# Altium PCB HVSUP_ISOL.PCBDOC (part 2 of 2)
Units mm, origin at the board's own origin, x right, y up, seen from the top; angles counter-clockwise.
Board outline 222.63 x 100.1 mm, 4 copper layers (Top, GP1(GND), L3, Bot), stack 1.648 mm thick; 144 components, 102 nets, 508 pads, 186 vias.
Unrouted connection lines stored in the file: 240.
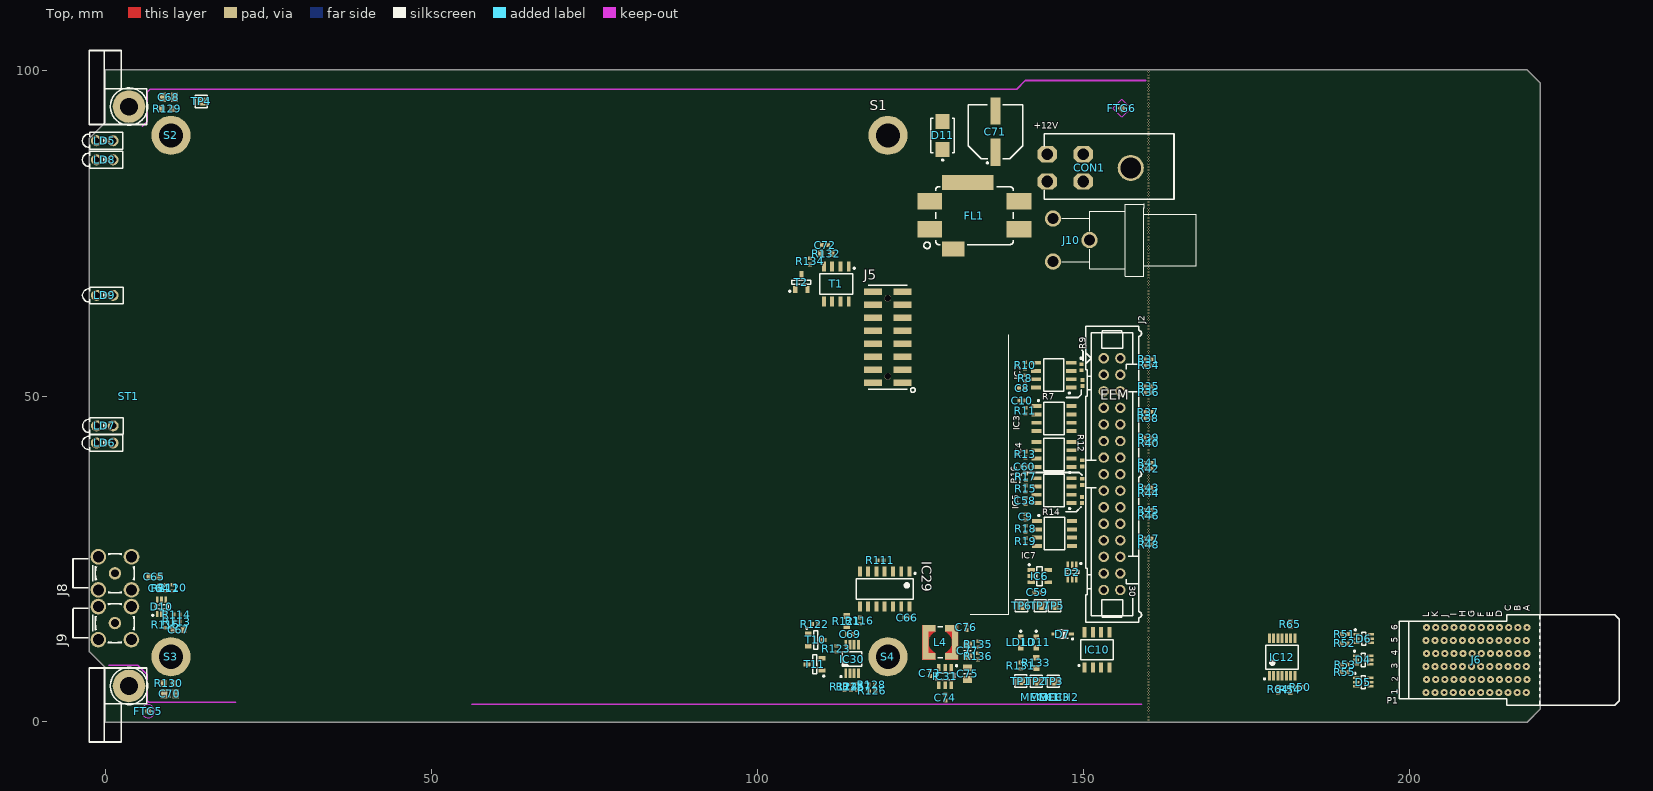
[diagram p0: Top view]

## Part data (continued)
R117 R118 R119 R120 R121: library part R0603_220R_1%_0.1W_100PPM, "Resistor - 1%", Case=0603, Manufacturer=GENERIC, Manufacturer1 ComponentHeight=0.55mm, Manufacturer1 Example="NIC COMPONENT", Manufacturer1 Part Number=NRC06F2200TRF, Power=0.1W, Tolerance=±1%, Author="CERN DEM JLC", Component Type=Standard, CreateDate=03.12.2007, HelpURL=\\cern.ch\dfs\Applications\Altium\Datasheets\R0603_NIC_NRC.pdf, LatestRevisionDate=13.03.2008, Manufacturer Part Number=R0603_220R_1%_0.1W_100PPM, Mounted=Yes, Part Description="General Purpose Thick Film Chip Resistor", Part Number=R0603_220R_1%_0.1W_100PPM, Pin Count=2, Sense=No, SMD=Yes, Socket=No, Status=Preferred, TC=±100ppm/°C
R129 R130: library part R0603_0R_JUMPER, "Resistor", Case=0603, Manufacturer=GENERIC, Manufacturer1 ComponentHeight=0.55mm, Manufacturer1 Example="NIC COMPONENT", Manufacturer1 Part Number=NRC06Z0, Author="CERN DEM JLC", Component Type=Standard, CreateDate=03.12.2007, HelpURL=\\cern.ch\dfs\Applications\Altium\Datasheets\R0603_NIC_NRC.pdf, LatestRevisionDate=13.03.2008, Manufacturer Part Number=R0603_0R_JUMPER, Mounted=Yes, Part Description="1A (0.05R Max DC Resistance) Zero Ohm Jumper", Part Number=R0603_0R_JUMPER, Pin Count=2, PressFit=No, Sense=No, SMD=Yes, Socket=No, Status=Preferred
R132: library part R0603_100K_1%_0.1W_100PPM, "Resistor - 1%", Case=0603, Manufacturer=GENERIC, Manufacturer1 ComponentHeight=0.55mm, Manufacturer1 Example="NIC COMPONENT", Manufacturer1 Part Number=NRC06F1003TRF, Power=0.1W, Tolerance=±1%, Author="CERN DEM JLC", Component Type=Standard, CreateDate=2007-12-03, HelpURL=\\cern.ch\dfs\Applications\Altium\Datasheets\R0603_NIC_NRC.pdf, LatestRevisionDate=2008-03-13, Manufacturer Part Number=R0603_100K_1%_0.1W_100PPM, Mounted=Yes, Part Description="General Purpose Thick Film Chip Resistor", Part Number=R0603_100K_1%_0.1W_100PPM, Pin Count=2, Sense=No, SMD=Yes, Socket=No, Status=Preferred, TC=±100ppm/°C
R133: library part R0603_1K_1%_0.1W_100PPM, "Resistor - 1%", Case=0603, Manufacturer=GENERIC, Manufacturer1 ComponentHeight=0.55mm, Manufacturer1 Example="NIC COMPONENT", Manufacturer1 Part Number=NRC06F1001TRF, Power=0.1W, Tolerance=±1%, Author="CERN DEM JLC", Component Type=Standard, CreateDate=03.12.2007, HelpURL=\\cern.ch\dfs\Applications\Altium\Datasheets\R0603_NIC_NRC.pdf, LatestRevisionDate=13.03.2008, Manufacturer Part Number=R0603_1K_1%_0.1W_100PPM, Mounted=Yes, Part Description="General Purpose Thick Film Chip Resistor", Part Number=R0603_1K_1%_0.1W_100PPM, Pin Count=2, PressFit=No, Sense=No, SMD=Yes, Socket=No, Status=Preferred, TC=±100ppm/°C
R135: library part R0402_31K6_0.1%_0.063W_25PPM_YAGEO_RT, "Resistor - 0.1%", Case=0402, Manufacturer=YAGEO, Manufacturer Part Number=RT0402BRD0731K6L, Power=0.063W, Tolerance=±0.1%, Voltage=50V, Author="CERN DEM BC", Component Type=Standard, ComponentHeight=0.35mm, CreateDate=30.07.2020, HelpURL=\\cern.ch\dfs\Applications\Altium\Datasheets\R0402_YAGEO_RT.pdf, LatestRevisionDate=30.07.2020, Mounted=Yes, Part Description="Thin Film Chip Resistor", Part Number=R0402_31K6_0.1%_0.063W_25PPM_YAGEO_RT, Pin Count=2, PressFit=No, Sense=No, SMD=Yes, Socket=No, Status="Not Recommended", TC=±25ppm/°C
S1 S2 S3 S4: library part "WA-SMSI,  9774030151", "WA-SMSI SMD Steel Spacer with internal Thread", Manufacturer="Wurth Elektronik", ComponentLink1Description=Manufacturer, ComponentLink1URL=http://www.we-online.de, ComponentLink2Description=Datasheet, ComponentLink2URL=http://katalog.we-online.de/em/datasheet/9774030151.pdf, Created by="Baojun Chen", Created Date=20.Oct.2015, partNo=9774030151
ST1: "Schroff 3HP 4U EUROCARD Panel Kit", Manufacturer=Schroff, Manufacturer Part Number=20818-017, Manufacturer Part Number 2=20848-664
T1: "-30V -19.7A P-Channel MOSFET", Case=SOIC8, Manufacturer="VISHAY SILICONIX", Author="CERN DEM MR", Bonding=No, Component Type=Standard, ComponentHeight=1.75mm, CreateDate=05/10/2016, Device=SI4425DDY-T1-GE3, HelpURL=\\cern.ch\dfs\Applications\Altium\Datasheets\SI4425DDY-T1-GE3.pdf, LatestRevisionDate=05/10/2016, Manufacturer Part Number=SI4425DDY-T1-GE3, Mounted=Yes, PackageDescription="SOIC 8, Pitch 1.27mm - Body 4x5mm, IPC Medium Density", Part Description="-30V -19.7A P-Channel MOSFET", Part Number=SI4425DDY-T1-GE3, Pin Count=8, PressFit=No, Sense=No, SMD=Yes, Socket=No
T2 T3 T4 T9 T10 T11: "N-CHANNEL MOSFET WITH DIODE", Case=SOT23-3, Manufacturer="ON SEMICONDUCTOR", Author="CERN DEM JLC", Bonding=No, Component Type=Standard, ComponentHeight=1.11mm, CreateDate=23.03.2009, Device=BSS138LT1G, HelpURL=\\cern.ch\dfs\Applications\Altium\Datasheets\BSS138LT1G.pdf, LatestRevisionDate=23.03.2009, Manufacturer Part Number=BSS138LT1G, Mounted=Yes, PackageDescription="SOT23 3-Leads, Pitch 0.95mm - Body 1.4x3mm, IPC Medium Density", Part Description="50V 200mA N-Channel Enhancement Mode Field-Effect Transistor", Part Number=BSS138LT1G, Pin Count=3, PressFit=No, Sense=No, SMD=Yes, Socket=No
TP1 TP2 TP3 TP4 TP5 TP6 TP7: library part SMD_PAD_1.27X1.27MM, Author="CERN DEM JLC", Component Type="Standard (No BOM)", ComponentHeight=0mm, CreateDate=12.01.2008, Family="Test Point", HelpURL=Undefined, LatestRevisionDate=12.01.2008, Mounted=No, PackageDescription="1.27mm x 1.27mm PCB Copper Area (SMD Test Point)", Part Description="1.27mm x 1.27mm PCB Copper Area (SMD Test Point)", Part Number=SMD_PAD_1.27X1.27MM, Pin Count=1, Sense=No, SMD=Yes, Socket=No, Status=None

## Via types
v1: diameter 0.3, hole 0.15, Top to Bot, tented both sides, 186 vias

## Nets (pads, with @x,y where several pads share a name; then routed paths per layer and width w, separated by ;. In a path a pad name is that pad's centre, name@x,y a point inside that pad or via, vN(x,y) a via of type N, cw(c..) or ccw(c..) an arc to the next point about the centre after c; other vN are vias at no path point)
BP_IO.GA0: R51.1
BP_IO.GA1: R52.1
BP_IO.GA2: R53.1
BP_IO.GA3: R55.1
BP_IO.LVDS_N0: J6.D3 R34.2
BP_IO.LVDS_N1: J6.B3 R36.2
BP_IO.LVDS_N2: J6.C4 R38.2
BP_IO.LVDS_N3: J6.L4 R40.2
BP_IO.LVDS_N4: J6.I4 R42.2
BP_IO.LVDS_N5: J6.K5 R44.2
BP_IO.LVDS_N6: J6.H5 R46.2
BP_IO.LVDS_N7: J6.F6 R48.2
BP_IO.LVDS_P0: J6.E3 R31.2
BP_IO.LVDS_P1: J6.A3 R35.2
BP_IO.LVDS_P2: J6.B4 R37.2
BP_IO.LVDS_P3: J6.K4 R39.2
BP_IO.LVDS_P4: J6.H4 R41.2
BP_IO.LVDS_P5: J6.J5 R43.2
BP_IO.LVDS_P6: J6.G5 R45.2
BP_IO.LVDS_P7: J6.E6 R47.2
BP_SCL: D5.1 IC12.8 IC12.11 J6.B2
BP_SDA: D5.3 IC12.1 IC12.4 J6.C2
CSN: J5.5 R13.1
DIO0: D10.3 J9.1 R113.1 R115.2
DIO1: D10.4 J8.1 R110.1 R112.2
GND: C8.1 C9.1 C10.1 C58.1 C59.1 C60.1 C64.1 C65.1 C66.1 C67.1 C68.2 C69.1 C70.2 C71.2 C74.1 C75.1 C76.1 C77.1 D2.2 D4.2 D5.2 D6.2 D10.2 D11.2 FL1.4 IC2.5 IC3.3 IC3.4 IC4.5 IC5.5 IC6.2 IC7.4 IC10.1 IC10.2 IC10.3 IC10.4 IC12.7 IC29.7 IC30.4 IC30.5 IC30.6 IC30.7 IC31.1 J2.1 J2.4 J2.7 J2.10 J2.13 J2.16 J2.19 J2.22 J2.25 J5.2 J5.4 J5.14 J5.16 J6.A2 J6.A4 J6.A6 J6.C1 J6.C5 J6.D2 J6.D4 J6.D6 J6.F1 J6.F5 J6.G2 J6.G4 J6.G6 J6.I1 J6.I5 J6.J2 J6.J4 J6.J6 J6.L1 J6.L5 J8.2 J9.2 LD10.1 LD11.1 R50.1 R118.2 R129.1 R130.1 R136.1 S1.1 S2.1 S3.1 S4.1 T2.2 T3.2 T4.2 T9.2 T10.2 T11.2 TP3.1 TP4.1
GNDF: CON1.1 CON1.2 FL1.3 J10.1
HV_EN: J5.15 R15.1 R111.2
HV_INTERLOCK: R19.1 R116.2 T9.1
I2C_SCL: D2.4 IC6.1 IC10.6 IC12.9 IC12.10 J2.27 R65.1 R128.1 TP6.1
I2C_SDA: D2.3 IC6.3 IC10.5 IC12.2 IC12.3 J2.26 R64.1 R126.1 TP5.1
INT0: J5.9 R18.1 T3.1
LVDS0_N: IC2.4 J2.3 R9.2 R34.1
LVDS0_P: IC2.3 J2.2 R9.1 R31.1
LVDS1_N: IC2.1 J2.6 R7.1 R36.1
LVDS1_P: IC2.2 J2.5 R7.2 R35.1
LVDS2_N: IC3.7 J2.9 R38.1
LVDS2_P: IC3.8 J2.8 R37.1
LVDS3_N: IC4.1 J2.12 R12.1 R40.1
LVDS3_P: IC4.2 J2.11 R12.2 R39.1
LVDS4_N: IC5.4 J2.15 R16.2 R42.1
LVDS4_P: IC5.3 J2.14 R16.1 R41.1
LVDS5_N: IC5.1 J2.18 R14.1 R44.1
LVDS5_P: IC5.2 J2.17 R14.2 R43.1
LVDS6_N: IC7.7 J2.21 R46.1
LVDS6_P: IC7.8 J2.20 R45.1
LVDS7_N: IC7.5 J2.24 R48.1
LVDS7_P: IC7.6 J2.23 R47.1
NetC65_2: C65.2 R112.1
NetC67_2: C67.2 R115.1
NetC68_1: C68.1 R129.2 ST1.1
NetC70_1: C70.1 R130.2 ST1.0
NetC72_1: C72.1 R132.1 R134.2 T1.4
NetC73_1: C73.1 IC31.6
NetC73_2: C73.2 IC31.2 L4.1
NetD4_3: D4.3 J6.I3 R53.2
NetD4_6: D4.6 J6.K2 R54.2
NetD5_6: D5.6 J6.L3 R55.2
NetD6_1: D6.1 J6.C3 R51.2
NetD6_3: D6.3 J6.F3 R52.2
NetIC2_6: IC2.6 R10.2
NetIC2_7: IC2.7 R8.2
NetIC3_2: IC3.2 R11.2
NetIC4_7: IC4.7 R13.2
NetIC5_6: IC5.6 R17.2
NetIC5_7: IC5.7 R15.2
NetIC7_2: IC7.2 R18.2
NetIC7_3: IC7.3 R19.2
NetIC29_5: IC29.5 R111.1
NetIC29_6: IC29.6 R110.2
NetIC29_8: IC29.8 R116.1
NetIC29_9: IC29.9 R113.2 R114.1
NetIC30_1: IC30.1 R124.1 R126.2
NetIC30_2: IC30.2 R125.1 R128.2
NetIC30_3: IC30.3 R127.1
NetIC31_4: IC31.4 R135.1 R136.2
NetLD5_1: LD5.1 R119.1
NetLD6_1: LD6.1 R120.1
NetLD7_2: LD7.2 R121.2
NetLD8_1: LD8.1 R117.1
NetLD9_1: LD9.1 R118.1
NetLD10_2: LD10.2 R131.1
NetLD11_2: LD11.2 R133.2
NetR117_2: R117.2 T3.3
NetR119_2: R119.2 T4.3
NetR120_2: R120.2 T9.3
NetR122_2: R122.2 T10.1 T11.3
NetR123_2: R123.2 R127.2 T11.1
NetR134_1: R134.1 T2.3
P3V3: C8.2 C9.2 C10.2 C58.2 C60.2 C64.2 C66.2 C76.2 C77.2 D7.2 D10.5 IC2.8 IC3.1 IC4.8 IC5.8 IC7.1 IC12.14 IC29.14 L4.2 LD5.2 LD6.2 LD8.2 LD9.2 R64.2 R65.2 R114.2 R133.1 R135.2
P3V3_MP: C59.2 C69.2 D2.5 D7.1 IC6.4 IC10.8 IC30.8 J2.30 R121.1 R122.1 R123.1 R124.2 R125.2 TP7.1
P3V3A: TP2.1
P12V0: C71.1 C72.2 C74.2 C75.2 D11.1 FL1.2 IC31.3 IC31.5 J2.28 J2.29 J6.A1 J6.D1 J6.E1 J6.G1 J6.H1 J6.J1 J6.K1 R131.2 R132.2 T1.1 T1.2 T1.3 TP1.1
P12V0_SW: J5.6 J5.8 J5.10 T1.5 T1.6 T1.7 T1.8
P12V0F: CON1.3 CON1.4 FL1.1 J10.3
PE_CLK.CLK_N: J6.F4
PE_CLK.CLK_P: J6.E4
PSU_EN: LD7.1 R17.1 T2.1 T4.1 T10.3
SCKI: J5.7 R10.1
SDI: J5.1 R8.1
SDO: J5.3 R11.1
SERVMOD: IC12.5 IC12.6 IC12.12 IC12.13 R50.2 R54.1
pads on no net: CON1.9 D2.1 D2.6 D4.1 D4.4 D4.5 D5.4 D5.5 D6.4 D6.5 D6.6 D10.1 D10.6 FTG5.FTG2 FTG6.1 FTG7.1 FTG8.1 IC3.5 IC3.6 IC4.3 IC4.4 IC4.6 IC6.5 IC10.7 IC29.1 IC29.2 IC29.3 IC29.4 IC29.10 IC29.11 IC29.12 IC29.13 J5. J5.11 J5.12 J5.13 J6.A5 J6.B1 J6.B5 J6.B6 J6.C6 J6.D5 J6.E2 J6.E5 J6.F2 J6.G3 J6.H2 J6.H3 J6.H6 J6.I2 J6.I6 J6.J3 J6.K3 J6.K6 J6.L2 J6.L6 J10.2 S1. S2. S3. S4.
copper on no net:
  other v1: 159.995,0.278 159.995,0.766 159.995,1.254 159.995,1.741 159.995,2.229 159.995,2.717 159.995,3.205 159.995,3.692 159.995,4.18 159.995,4.668 159.995,5.156 159.995,5.643 159.995,6.131 159.995,6.619 159.995,7.107 159.995,7.594 159.995,8.082 159.995,8.57 159.995,9.058 159.995,9.545 159.995,10.033 159.995,10.521 159.995,11.009 159.995,11.009 159.995,11.496 159.995,11.984 159.995,12.472 159.995,12.96 159.995,13.447 159.995,13.935 159.995,14.423 159.995,14.911 159.995,15.398 159.995,15.886 159.995,16.374 159.995,16.862 159.995,17.349 159.995,17.837 159.995,18.325 159.995,18.813 159.995,19.3 159.995,19.788 159.995,20.276 159.995,20.763 159.995,21.251 159.995,21.739 159.995,22.227 159.995,22.714 159.995,23.202 159.995,23.69 159.995,23.69 159.995,24.178 159.995,24.665 159.995,25.153 159.995,25.641 159.995,26.129 159.995,26.616 159.995,28.567 159.995,29.055 159.995,29.543 159.995,30.031 159.995,30.518 159.995,31.006 159.995,32.957 159.995,33.445 159.995,33.933 159.995,34.42 159.995,36.371 159.995,36.859 159.995,37.347 159.995,37.835 159.995,38.322 159.995,40.273 159.995,40.761 159.995,41.249 159.995,41.736 159.995,42.224 159.995,44.175 159.995,44.663 159.995,45.151 159.995,45.638 160,46 159.995,48.077 159.995,48.565 159.995,49.053 159.995,49.053 159.995,49.54 159.995,50.028 159.995,51.979 159.995,52.467 159.995,52.955 159.995,53.442 159.995,53.93 159.995,56.369 159.995,56.857 159.995,57.344 159.995,57.832 159.995,58.32 159.995,58.807 159.995,59.295 159.995,59.783 159.995,60.271 159.995,60.758 159.995,61.246 159.995,61.734 159.995,61.734 159.995,62.222 159.995,62.709 159.995,63.197 159.995,63.685 159.995,64.173 159.995,64.66 159.995,65.148 159.995,65.636 159.995,66.124 159.995,66.611 159.995,67.099 159.995,67.587 159.995,68.075 159.995,68.562 159.995,69.05 159.995,69.538 159.995,70.026 159.995,70.513 159.995,71.001 159.995,71.489 159.995,71.977 159.995,72.464 159.995,72.952 159.995,73.44 159.995,73.928 159.995,74.415 159.995,74.415 159.995,74.903 159.995,75.391 159.995,75.878 159.995,76.366 159.995,76.854 159.995,77.342 159.995,77.829 159.995,78.317 159.995,78.805 159.995,79.293 159.995,79.78 159.995,80.268 159.995,80.756 159.995,81.244 159.995,81.731 159.995,82.219 159.995,82.707 159.995,83.195 159.995,83.682 159.995,84.17 159.995,84.658 159.995,85.146 159.995,85.633 159.995,86.121 159.995,86.609 159.995,87.097 159.995,87.097 159.995,87.584 159.995,88.072 159.995,88.56 159.995,89.048 159.995,89.535 159.995,90.023 159.995,90.511 159.995,90.999 159.995,91.486 159.995,91.974 159.995,92.462 159.995,92.95 159.995,93.437 159.995,93.925 159.995,94.413 159.995,94.9 159.995,95.388 159.995,95.876 159.995,96.364 159.995,96.851 159.995,97.339 159.995,97.827 159.995,98.315 159.995,98.802 159.995,99.29 159.995,99.778

## Polygon pours and split planes (outlines as drawn)
GND on GP1(GND) (split plane): 159.995,99.54 159.995,99.502 160.038,99.52 160.036,99.54 217.848,99.54 219.579,97.81 219.579,2.19 217.848,0.46 0.46,0.46 0.46,8.299 0.45,8.398 0.421,8.494 0.374,8.582 0.311,8.66 -2.029,11 -2.029,15.106 -2.005,15.104 -1.991,15.138 -2.029,15.138 -2.029,15.14 -2.029,15.142 -2.029,15.144 -2.029,15.145 -2.029,15.146 -1.991,15.146 -2.005,15.18 -2.029,15.178 -2.029,22.645 -2.029,89.32 0.311,91.66 0.374,91.737 0.421,91.826 0.45,91.921 0.46,92.021 0.46,99.54 159.99,99.54 159.993,99.54

## Keep-outs
Top:
  lines w0.254: 0.453,8.689 4.9,8.689 6.35,7.239 6.35,6.475 ; 5.639,91.389 6.325,92.075 6.325,93.523 ; 6.325,95.174 6.325,96.597 6.782,97.053 139.743,97.053 141.089,98.4 159.577,98.4 ; 6.35,4.7 6.35,3.251 6.601,3 19.888,3 ; 56.137,2.721 158.944,2.721
Bot:
  lines w0.254: 0.025,91.389 5.639,91.389 6.325,92.075 6.325,96.597 7.036,97.307 159.461,97.307 ; 0.356,8.712 4.801,8.712 6.35,7.163 6.35,6.475 ; 6.35,7.214 6.35,6.475 ; 21.097,3.048 6.553,3.048 6.35,3.251 6.35,4.7 6.35,4.775 6.629,5.055 6.629,6.196 6.35,6.475 ; 68.788,2.713 148.865,2.713 159.563,2.713

## Other copper
GP1(GND) (plane layer: these items are gaps in the copper):
  rectangle: 82.174,12.776 91.389,16.114

## Silkscreen, mask and mechanical layers (free items; w line width, h text height)
TopOverlay:
  circle w0.254: c3.556,5.512 r2.857
  circle w0.254: c3.556,94.412 r2.857
  lines w0.1: 132.664,16.51 138.5,16.51 138.571,16.581 138.571,59.436
  lines w0.254: 140.208,36.678 140.208,37.713 140.77,38.275 149.357,38.275 149.794,37.838 ; 147.269,32.233 148.898,32.233 149.631,32.966 ; 147.38,49.784 149.2,49.784 149.685,50.269 149.685,50.978 ; 149.767,57.008 149.794,57.008 149.936,56.865 149.936,55.425
  text "+12V" at 142.4,91 h1.02
  text "EEM" at 152.603,49.403 h1.52
BottomOverlay:
  lines w0.254: 141.402,50.013 144.508,50.013 144.678,49.842 ; 142.843,32.18 144.714,32.18 144.865,32.029
Mechanical1:
  lines w0.1: -2.489,10.809 0,8.32 0,0 159.995,0 ; -2.489,10.82 -2.489,15.138 ; -2.489,15.145 -2.489,22.645 ; -2.489,22.645 -2.489,89.511 -1,91 0,92 0,100 159.995,100 ; -2.489,22.645 -2.489,22.645 ; 159.995,0 218.039,0 220.039,2 220.039,98 218.039,100 159.995,100 ; 159.995,0 159.995,100
Mechanical4:
  lines w0.1: -2.6,-14.238 -2.6,117.232
  lines w0.15: -5.044,-14.194 -5.044,114.162
  lines w0.3: 0.482,44 1.75,44 ; 0.482,61 1.75,61 ; 0.914,79.4 1.014,79.5 2.5,79.5 ; 1.232,28.95 2.5,28.95 ; 1.232,35.5 2.5,35.5 ; 1.232,52.5 2.5,52.5 ; 1.232,69.5 2.5,69.5 ; 1.232,76.5 2.5,76.5 3.759,76.5 ; 1.232,86.5 2.5,86.5 ; 1.739,45.562 1.75,45.551 1.75,44 ; 1.739,62.562 1.75,62.551 1.75,61 ; 1.75,42.652 1.75,44 ; 1.75,59.652 1.75,61 ; 2.288,5.512 3.556,5.512 ; 2.464,74.854 2.5,74.89 2.5,79.5 ; 2.489,30.512 2.5,30.501 2.5,28.95 ; 2.489,37.062 2.5,37.051 2.5,35.5 ; 2.489,54.062 2.5,54.051 2.5,52.5 ; 2.489,71.062 2.5,71.051 2.5,69.5 ; 2.489,88.062 2.5,88.051 2.5,86.5 ; 2.5,27.602 2.5,28.95 ; 2.5,34.152 2.5,35.5 ; 2.5,51.152 2.5,52.5 ; 2.5,68.152 2.5,69.5 ; 2.5,81.712 2.5,79.5 ; 2.5,85.152 2.5,86.5 ; 3.545,7.074 3.556,7.063 3.556,5.512 ; 3.556,4.163 3.556,5.512 ; 3.606,44 1.75,44 ; 3.606,61 1.75,61 ; 3.759,79.5 2.5,79.5 ; 4.356,28.95 2.5,28.95 ; 4.356,35.5 2.5,35.5 ; 4.356,52.5 2.5,52.5 ; 4.356,69.5 2.5,69.5 ; 4.356,86.5 2.5,86.5 ; 5.412,5.512 3.556,5.512
DrillDrawing:
  drawing of 295 lines, arcs and shapes, not listed
  text "Layer" at 8.894,137.706 h1.52
  text "Name" at 19.305,137.706 h1.52
  text "Material" at 41.397,137.706 h1.52
  text "Thickness" at 63.235,137.706 h1.52
  text "Constant" at 79.741,137.706 h1.52
  text "Board Layer Stack" at 94.216,137.706 h1.52
  text "TopOverlay" at 19.305,134.658 h1.52
  text "TopSolder" at 19.305,131.61 h1.52
  text "Solder Resist" at 41.397,131.61 h1.52
  text "0,010mm" at 63.235,131.61 h1.52
  text "3.5" at 79.741,131.61 h1.52
  text "1" at 8.894,128.562 h1.52
  text "Top" at 19.305,128.562 h1.52
  text "0,058mm" at 63.235,128.562 h1.52
  text "Dielectric1" at 19.305,125.514 h1.52
  text "FR-4" at 41.397,125.514 h1.52
  text "0,180mm" at 63.235,125.514 h1.52
  text "4.2" at 79.741,125.514 h1.52
  text "2" at 8.894,122.466 h1.52
  text "GP1(GND)" at 19.305,122.466 h1.52
  text "0,036mm" at 63.235,122.466 h1.52
  text "Dielectric 3" at 19.305,119.418 h1.52
  text "FR-4" at 41.397,119.418 h1.52
  text "1,100mm" at 63.235,119.418 h1.52
  text "4.2" at 79.741,119.418 h1.52
  text "3" at 8.894,116.37 h1.52
  text "L3" at 19.305,116.37 h1.52
  text "0,036mm" at 63.235,116.37 h1.52
  text "Dielectric2" at 19.305,113.322 h1.52
  text "FR-4" at 41.397,113.322 h1.52
  text "0,180mm" at 63.235,113.322 h1.52
  text "4.2" at 79.741,113.322 h1.52
  text "4" at 8.894,110.274 h1.52
  text "Bot" at 19.305,110.274 h1.52
  text "0,058mm" at 63.235,110.274 h1.52
  text "BottomSolder" at 19.305,107.226 h1.52
  text "Solder Resist" at 41.397,107.226 h1.52
  text "0,010mm" at 63.235,107.226 h1.52
  text "3.5" at 79.741,107.226 h1.52
  text "BottomOverlay" at 19.305,104.178 h1.52

## Text inside footprints (layer, text, board x,y; h text height)
J2: TopOverlay "30" at 157.051,20.873 h1.02 r270; Mechanical14 "30" at 157.051,20.873 h1.02 r270
J6: TopOverlay "A" at 218.464,16.95 h1 r90; TopOverlay "B" at 217.064,16.95 h1 r90; TopOverlay "C" at 215.664,16.95 h1 r90; TopOverlay "D" at 214.264,16.025 h1 r90; TopOverlay "E" at 212.864,16.025 h1 r90; TopOverlay "6" at 198.225,14.075 h1 r90; TopOverlay "5" at 198.225,12.125 h1 r90; TopOverlay "4" at 198.2,10.175 h1 r90; TopOverlay "3" at 198.25,8.175 h1 r90; TopOverlay "F" at 211.464,16.025 h1 r90; TopOverlay "G" at 210.064,16.025 h1 r90; TopOverlay "H" at 208.664,16.025 h1 r90; TopOverlay "I" at 207.264,16.275 h1 r90; TopOverlay "J" at 205.864,16.025 h1 r90; TopOverlay "K" at 204.464,16.025 h1 r90; TopOverlay "2" at 198.239,6.15 h0.95 r90; TopOverlay "L" at 203.064,16.025 h1 r90; TopOverlay "1" at 198.239,4.15 h1 r90; Mechanical14 "A" at 218.439,1.3 h1 r90; Mechanical14 "B" at 217.039,1.3 h1 r90; Mechanical14 "C" at 215.639,1.3 h1 r90; Mechanical14 "D" at 214.239,2.3 h1 r90; Mechanical14 "E" at 212.839,2.3 h1 r90; Mechanical14 "6" at 197.989,14.15 h1 r90; Mechanical14 "5" at 197.989,12.15 h1 r90; Mechanical14 "4" at 197.989,10.15 h1 r90; Mechanical14 "3" at 197.989,8.15 h1 r90; Mechanical14 "F" at 211.439,2.3 h1 r90; Mechanical14 "G" at 210.039,2.3 h1 r90; Mechanical14 "H" at 208.639,2.3 h1 r90; Mechanical14 "I" at 207.239,2.55 h1 r90; Mechanical14 "J" at 205.839,2.3 h1 r90; Mechanical14 "K" at 204.439,2.3 h1 r90; Mechanical14 "1" at 197.989,4.15 h1 r90; Mechanical14 "2" at 197.989,6.15 h1 r90; Mechanical14 "L" at 203.039,2.3 h1 r90; Mechanical8 "Top Surface of Mother Board" at 232.289,5.125 h0.5 r90; Mechanical8 "Edge of Daugher Card" at 220.789,6.275 h0.5 r90